# Altium PCB ethernet_ipphone_pcb.PcbDoc
Units mil, origin at the board's own origin, x right, y up, seen from the top; angles counter-clockwise.
Board outline 2451 x 1336 mil, 2 copper layers (Top Layer, Bottom Layer); 41 components, 37 nets, 160 pads, 39 vias.
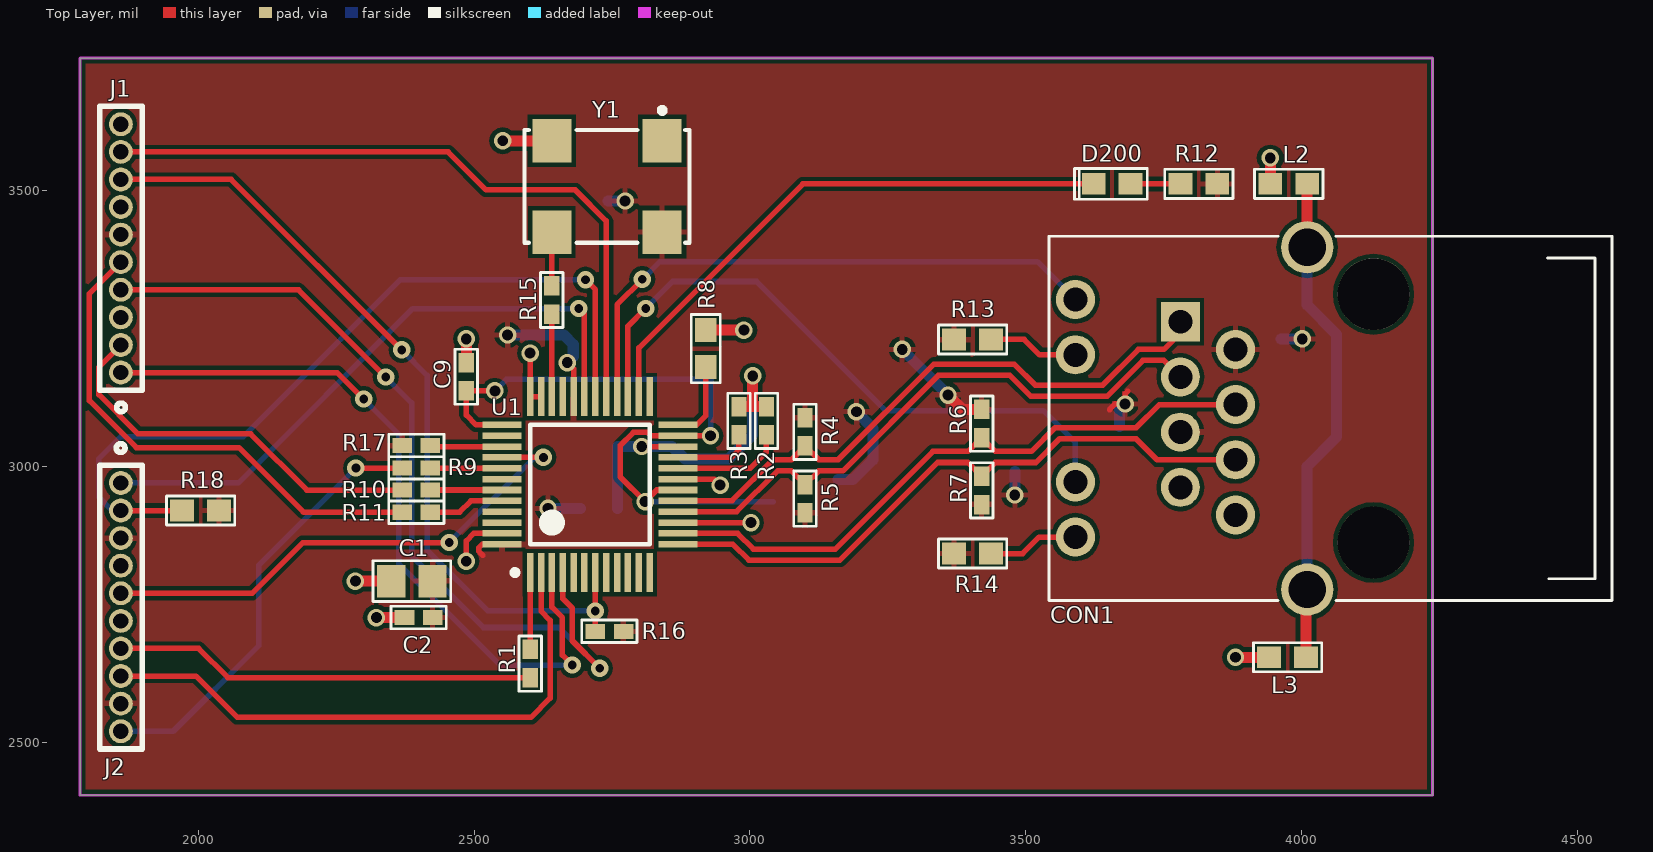
[diagram p0: Top Layer view]
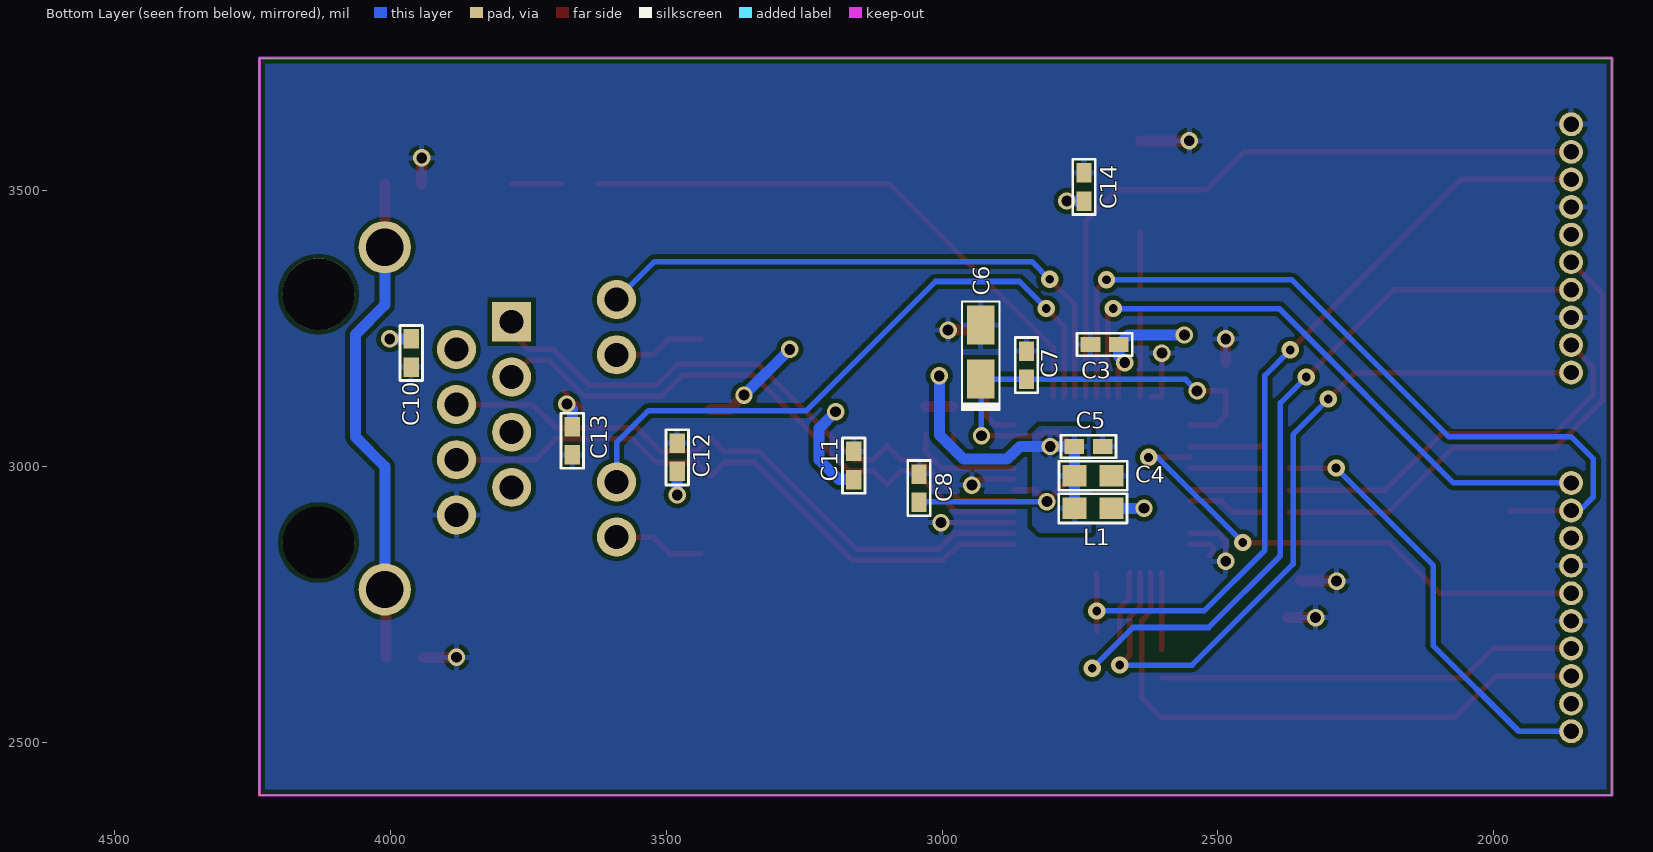
[diagram p1: Bottom Layer view, seen from below]
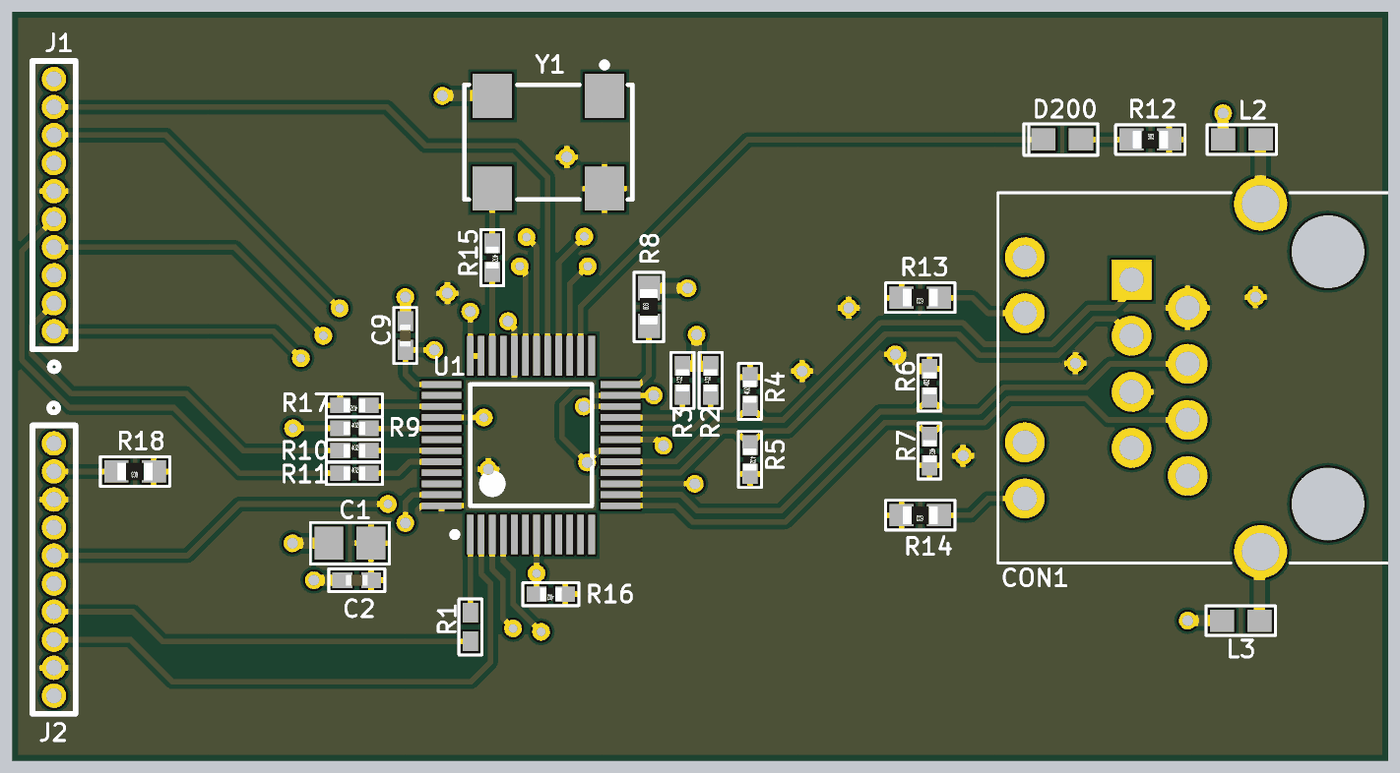
[diagram p2: 3D render of the assembled board from above, using the file's embedded part models]
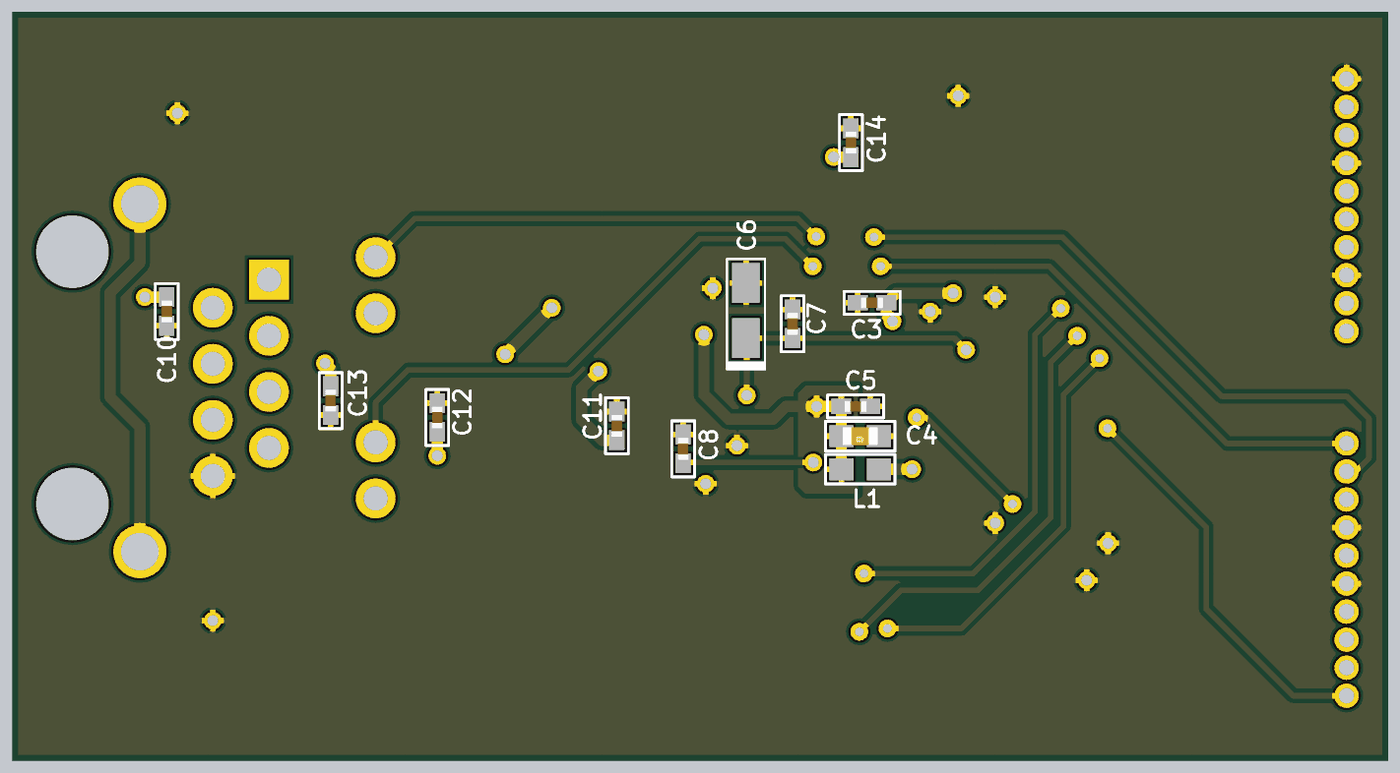
[diagram p3: 3D render of the assembled board from below, using the file's embedded part models]

## Layer stack, top to bottom
Top Layer: signal copper 1.4
Dielectric: dielectric 12.6, FR-4, Dk 4.8
Bottom Layer: signal copper 1.4

## Board outline
1786,2404 1786,3740 4237,3740 4237,2404

## Design rules (kind name [scope] priority, off if disabled: settings)
Clearance [All] p1: gap=5
ComponentClearance [All] p1: gap=0 collisioncheckmode=3 verticalgap=5 showdistances=FALSE
DiffPairsRouting [All] p1: maxlimit=20 minlimit=5 mostfreqgap=10 maxuncoupledlength=500
PolygonConnect [All] p1: connectstyle=Relief reliefconductorwidth=10 reliefentries=4 polygonreliefangle="90 Angle"
RoutingVias [All] p1: holewidth=23.62 width=35.43 viastyle="Through Hole" minholewidth=11.81 minwidth=23.62 maxholewidth=35.43 maxwidth=51.18
SilkscreenOverComponentPads [All] p1: minsilkscreentomaskgap=10
SolderMaskExpansion [All] p1: expansion=4
Width [All] p1: maxlimit=30 minlimit=5 preferedwidth=10 minimp=50.000000 maximp=50.000000 favimp=50.000000
25 further rules are at their usual default settings.

## Classes and differential pairs
differential pair RD: +RD_P -RD_N
differential pair TD: +TD_P -TD_N

## Components (designator, comment, footprint, x,y, rotation, side; value= is the part's Value field where it differs from the comment)
C1 "10uF" CC2012-0805 2350,2792 r0 top
C2 "100nF" CC1005-0402 2374,2726 r0 top
C3 "100nF" CC1005-0402 2731,3221 r180 bottom
C4 "1uF" CC1608-0603 2693,2983 r0 bottom
C5 "100nF" CC1005-0402 2709,3036 r0 bottom
C6 "10uF" C_Case_A 2930,3207.2 r90 bottom
C7 "100nF" CC1005-0402 2847,3209 r270 bottom
C8 "100nF" CC1005-0402 3042,2986 r270 bottom
C9 "100nF" CC1005-0402 2486,3188 r270 top
C10 "100nF" CC1005-0402 3962,3231 r270 bottom
C11 "100nF" CC1005-0402 3160,3027 r270 bottom
C12 "100nF" CC1005-0402 3480,3042 r270 bottom
C13 "100nF" CC1005-0402 3670,3072 r270 bottom
C14 "10nF" CC1005-0402 2743,3532 r270 bottom
CON1 "RJ-45" RJ-45 3780,3262 r90 top
D200 "RED" LED_0603 3690,3512 r180 top
J1 "CONN HEADER" CONECTOR_10_PIN 1860,3170 r90 top
J2 "CONN HEADER" CONECTOR_10_PIN 1860,2970 r270 top
L1 "FBEAD" INDUTOR_0603 2693.07,2924 r0 bottom
L2 "FBEAD" INDUTOR_0603 3943,3512 r0 top
L3 "FBEAD" INDUTOR_0603 3941,2654 r0 top
R1 "49R9" CR1005-0402_NP 2602,2617 r90 top
R2 "2K2" CR1005-0402 3030,3057 r90 top
R3 "2K2" CR1005-0402 2980,3057 r90 top
R4 "49R9" CR1005-0402 3100,3037 r90 top
R5 "49R9" CR1005-0402 3100,2967 r270 top
R6 "49R9" CR1005-0402 3420,3052 r90 top
R7 "49R9" CR1005-0402 3420,2982 r270 top
R8 "4K87" CR1608-0603 2920,3180 r90 top
R9 "49R9" CR1005-0402 2369.82,2997 r0 top
R10 "49R9" CR1005-0402 2369.82,2957 r0 top
R11 "49R9" CR1005-0402 2369.82,2917 r0 top
R12 "100R" CR1608-0603 3780,3512 r0 top
R13 "100R" CR1608-0603 3437,3230 r180 top
R14 "100R" CR1608-0603 3437,2842 r180 top
R15 "33R" CR1005-0402 2641,3327 r270 top
R16 "10K" CR1005-0402 2771,2701 r180 top
R17 "2K2" CR1005-0402 2421,3038 r180 top
R18 "1K5" CR1608-0603 2038,2920 r180 top
U1 "DP83848C" LQFP48 2710,2967 r90 top
Y1 "25MHz" OSC_25MHz_PHY 2841,3590 r0 top

## Footprints (in the part's own frame and the unit in brackets; to place one, negate y for a bottom-side part, rotate by r counter-clockwise, add the part's x,y. Pads: shape width x height; smd on the part's side, far side on the other; paste and mask are expansions set on the pad)
C_Case_A [mm]
  rect 1.8x1.25 smd: 1(-1.25,0) 2(1.25,0)
  silkscreen extent -2.67,-0.9 2.33,0.9
CC1005-0402 [mm] "Chip Capacitor; Body 1.0 x 0.5 mm (LxW typ)"
  rect 0.9x0.7 smd: 1(0,0) 2(1.3,0)
  silkscreen extent -0.62,-0.52 1.92,0.52, body extent 0.15,-0.25 1.15,0.25, height 0.5
CC1608-0603 [mm] "Chip Capacitor; Body 1.6 x 0.8 mm (LxW typ)"
  rect 1.1x1 smd: 1(0,0) 2(1.7,0)
  silkscreen extent -0.72,-0.67 2.42,0.67, body extent 0.05,-0.4 1.65,0.4, height 0.3
CC2012-0805 [mm] "Chip Capacitor; Body 2.0 x 1.2 mm (LxW typ)"
  rect 1.3x1.5 smd: 1(0,0) 2(1.9,0)
  silkscreen extent -0.84,-0.94 2.74,0.94
CONECTOR_10_PIN [mm]
  round 1.1 hole 0.7: 1(0,0) 2(1.27,0) 3(2.54,0) 4(3.81,0) 5(5.08,0) 6(6.35,0) 7(7.62,0) 8(8.89,0) 9(10.16,0) 10(11.43,0)
  silkscreen extent -1.81,-0.98 12.25,0.98
CR1005-0402 [mm] "Chip Resistor; Body 1.1 x 0.5 mm (LxW typ)"
  rect 0.9x0.7 smd: 1(0,0) 2(1.3,0)
  silkscreen extent -0.62,-0.52 1.92,0.52, body extent 0.15,-0.3 1.15,0.3, height 0.2
CR1005-0402_NP [mm] "Chip Resistor; Body 1.1 x 0.5 mm (LxW typ)"
  rect 0.9x0.7 smd: 1(0,0) 2(1.3,0)
  silkscreen extent -0.62,-0.52 1.92,0.52
CR1608-0603 [mm] "Chip Resistor; Body 1.6 x 0.8 mm (LxW typ)"
  rect 1.1x1 smd: 1(0,0) 2(1.7,0)
  silkscreen extent -0.72,-0.67 2.42,0.67, body extent 0.05,-0.4 1.65,0.4, height 0.3
INDUTOR_0603 [mm]
  rect 1.1x1 smd: 1(0,0) 2(1.7,0)
  silkscreen extent -0.72,-0.67 2.42,0.67
LED_0603 [mm] "LED 0603"
  rect 1.1x1 smd: 1(0,0) 2(1.7,0)
  silkscreen extent -0.76,-0.71 2.59,0.71
LQFP48 [mm]
  rect 1.8x0.3 smd: 1(-4.05,2.75) 2(-4.05,2.25) 3(-4.05,1.75) 4(-4.05,1.25) 5(-4.05,0.75) 6(-4.05,0.25) 7(-4.05,-0.25) 8(-4.05,-0.75) 9(-4.05,-1.25) 10(-4.05,-1.75) 11(-4.05,-2.25) 12(-4.05,-2.75) 25(4.05,-2.75) 26(4.05,-2.25) 27(4.05,-1.75) 28(4.05,-1.25) 29(4.05,-0.75) 30(4.05,-0.25) 31(4.05,0.25) 32(4.05,0.75) 33(4.05,1.25) 34(4.05,1.75) 35(4.05,2.25) 36(4.05,2.75)
  rect 0.3x1.8 smd: 13(-2.75,-4.05) 14(-2.25,-4.05) 15(-1.75,-4.05) 16(-1.25,-4.05) 17(-0.75,-4.05) 18(-0.25,-4.05) 19(0.25,-4.05) 20(0.75,-4.05) 21(1.25,-4.05) 22(1.75,-4.05) 23(2.25,-4.05) 24(2.75,-4.05) 37(2.75,4.05) 38(2.25,4.05) 39(1.75,4.05) 40(1.25,4.05) 41(0.75,4.05) 42(0.25,4.05) 43(-0.25,4.05) 44(-0.75,4.05) 45(-1.25,4.05) 46(-1.75,4.05) 47(-2.25,4.05) 48(-2.75,4.05)
  silkscreen extent -4.17,-2.75 2.75,3.57
OSC_25MHz_PHY [mm]
  rect 1.8x2 smd: 1(0,0) 2(-5.08,0) 3(-5.08,-4.2) 4(0,-4.2)
  silkscreen extent -6.34,-4.7 1.26,1.52
RJ-45 [mm]
  rect 1.8x1.8 hole 1.1: 1(0,0)
  round 1.8 hole 1.1: 2(-1.27,-2.54) 3(-2.54,0) 4(-3.81,-2.54) 5(-5.08,0) 6(-6.35,-2.54) 7(-7.62,0) 8(-8.89,-2.54) 9(1.02,4.83) 10(-1.52,4.83) 11(-7.37,4.83) 12(-9.91,4.83)
  round 2.4 hole 1.71: 13(3.43,-5.84) 14(-12.32,-5.84)
  round 3.3 hole 3.3 unplated: ""(-10.16,-8.89) ""(1.27,-8.89)
  silkscreen extent -12.83,-19.87 3.94,6.04

## Part data
C1: library part Capacitor, "Capacitor SMD/SMT 0603 10uF 6.3volts X5R 20%"
C2 C3 C5 C7 C8 C9 C10 C11 C12 C13: library part Capacitor, "MLCC - SMD/SMT 0.1UF 16V 10% 0402"
C4: library part Capacitor, "Capacitor"
C6: library part Capacitor_Tan, "Capacitor Tantalum"
C14: library part Capacitor, "Capacitor SMD/SMT 0402 0.01uF 16volts X7R 10%"
CON1: "Ethernet & Telecom Connectors 1X1 RJ45 JACK"
D200: library part LED, "LED"
J1 J2: library part "Conector 10pin", "CONN HEADER .050\" 10POS PCB GOLD"
L1 L2 L3: library part Inductor, "Inductor"
R1 R4 R5 R6 R7 R9 R10 R11: library part Resistor, "Thick Film Resistors - SMD 1/16watt 49.9ohms 1% 0402"
R2 R3 R17: library part Resistor, "Thick Film Resistors SMD 0402 2K2 5%  1/16 W"
R8: library part Resistor
R12 R13 R14: library part Resistor, "Thick Film Resistors 1/16WATT 100R 0402"
R15: library part Resistor, "Thick Film Resistors SMD 0402 33R 5%  1/16 W"
R16: library part Resistor, "Thick Film Resistors SMD 0402 10K 5%  1/16 W"
R18: library part Resistor, "Thick Film Resistors 1.5KOHM 5% 1/10W"
U1: "IC TXRX ETHERNET PHYTER 48-LQFP"
Y1: library part Oscillator_25MHz_Phy, "Standard Clock Oscillators 3.3V 25MHZ"

## Via types
v1: diameter 31.5, hole 19.68, Top Layer to Bottom Layer, 26 vias
v2: diameter 31.5, hole 15.75, Top Layer to Bottom Layer, 13 vias

## Nets (pads, with @x,y where several pads share a name; then routed paths per layer and width w, separated by ;. In a path a pad name is that pad's centre, name@x,y a point inside that pad or via, vN(x,y) a via of type N, cw(c..) or ccw(c..) an arc to the next point about the centre after c; other vN are vias at no path point)
\R\E\S\E\T\: J1.9 U1.29 | length 1249.8
  Top Layer w10: J1.9 2453,3570 2522,3501 2683.42,3501 2739.53,3444.89 U1.29
AVCC3V3: C4.2 C5.2 L1.2 R2.2 R3.2 U1.22 | length 662.9
  Top Layer w10: v1(2804,3035.9) U1.22
  Top Layer w20: R3.2 3005,3108.18 ; v1(3005,3164) 3005,3108.18 ; R2.2 3005,3108.18
  Bottom Layer w20: L1.2 2760.18,2924.18 C5.2 2803.9,3036 v1(2804,3035.9) 2859.1,3035.9 2882,3013 2961,3013 3005,3057 v1(3005,3164)
CRS_DV: J2.5 U1.40 | length 943
  Top Layer w10: J2.5 2098,2770 2190,2862 v2(2455,2862) ; U1.40 v2(2625.79,3016.21)
  Bottom Layer w10: v2(2455,2862) 2609.21,3016.21 v2(2625.79,3016.21)
EARTH: CON1.13 CON1.14 L2.2 L3.2 | length 902.8
  Top Layer w20: L3.2 4007.93,2774.97 CON1.14 ; CON1.13 L2.2
  Bottom Layer w20: CON1.14 4009.92,2999.92 4063,3053 4063,3239 4009.92,3292.08 CON1.13
GND: C1.1 C2.1 C3.1 C4.1 C5.1 C6.2 C7.1 C8.1 C9.1 C10.2 C11.1 C12.1 C13.2 C14.1 CON1.8 J1.3 J1.7 J1.10 J2.4 J2.6 L2.1 L3.1 R8.2 U1.15 U1.19 U1.35 U1.36 U1.47 Y1.2 | length 844.2
  Top Layer w10: v1(2486,2828) 2486,2865 2499.42,2878.42 U1.47 ; v1(2601.73,3205.27) U1.36 U1.35 ; U1.15 v1(3001.9,2898.1) ; U1.19 2935.16,2976.84 v1(2946,2966)
  Top Layer w20: v1(2285,2792) C1.1 ; v1(2323,2726) C2.1 ; C9.1 v1(2486,3231) ; v1(2552,3590) Y1.2 ; R8.2 v1(2989.07,3246.93) ; v1(3880,2654) L3.1 ; L2.1 v1(3943,3559)
MDC: J2.1 U1.31 | length 1124.6
  Top Layer w10: v2(2690,3286) 2700.16,3275.84 U1.31
  Bottom Layer w10: J2.1 2073,2970 2389,3286 v2(2690,3286)
MDIO: J2.2 R18.2 U1.30 | length 1466.2
  Top Layer w10: J2.2 R18.2 ; v2(2702,3338) 2719.84,3320.16 U1.30
  Bottom Layer w10: J2.2 1844,2920 1820,2944 1820,3014 1860,3054 2082,3054 2366,3338 v2(2702,3338)
NetCON1_9: CON1.9 U1.28 | length 1058.1
  Top Layer w10: U1.28 2759.21,3293.21 v2(2805,3339)
  Bottom Layer w10: v2(2805,3339) 2837,3371 3521,3371 CON1.9
NetCON1_10: CON1.10 R13.1 | length 164.4
  Top Layer w10: R13.1 3497,3230 3524.84,3202.16 CON1.10
NetCON1_11: CON1.11 U1.27 | length 1164.2
  Top Layer w10: U1.27 2778.9,3253.9 v2(2811,3286)
  Bottom Layer w10: v2(2811,3286) 2860,3335 3012,3335 3246,3101 3532,3101 3589.84,3043.16 CON1.11
NetCON1_12: CON1.12 R14.1 | length 165.2
  Top Layer w10: R14.1 3494,2842 3523.84,2871.84 CON1.12
NetD200_1: D200.1 R12.1 | length 90
  Top Layer w10: D200.1 R12.1
NetD200_2: D200.2 U1.26 | length 1035.8
  Top Layer w10: U1.26 2798.58,3214.58 3096,3512 D200.2
NetR1_2: R1.2 U1.1 | length 139.5
  Top Layer w10: U1.1 2601.73,2668.45 R1.2
NetR2_1: R2.1 U1.20 | length 203.8
  Top Layer w10: U1.20 3000.53,2996.53 3030,3026 R2.1
NetR3_1: R3.1 U1.21 | length 143.3
  Top Layer w10: U1.21 2966.21,3016.21 2980,3030 R3.1
NetR8_1: R8.1 U1.24 | length 145.5
  Top Layer w10: U1.24 2903.27,3075.27 2920,3092 R8.1
NetR9_2: R9.2 U1.41 | length 129.7
  Top Layer w10: R9.2 2421.47,2996.53 U1.41
NetR10_2: R10.2 U1.43 | length 129.6
  Top Layer w10: R10.2 2421.16,2957.16 U1.43
NetR11_2: R11.2 U1.44 | length 138
  Top Layer w10: R11.2 2474,2917 2494.47,2937.47 U1.44
NetR15_1: R15.1 Y1.3 | length 97.6
  Top Layer w10: R15.1 Y1.3
NetR15_2: R15.2 U1.34 | length 149.4
  Top Layer w10: R15.2 2641,3126.55 U1.34
NetR17_1: R17.1 U1.39 | length 130.4
  Top Layer w10: R17.1 2423.1,3035.9 U1.39
P\H\Y\_\I\N\T\: J1.8 R16.2 U1.7 | length 1476
  Top Layer w10: J1.8 2060,3520 v2(2369,3211) ; R16.2 v2(2719.84,2738) U1.7
  Bottom Layer w10: v2(2369,3211) 2415,3165 2415,2848 2525,2738 v2(2719.84,2738)
PF: C6.1 C7.2 C8.2 C9.2 U1.18 U1.23 U1.37 | length 1267.7
  Top Layer w10: v1(2537.82,3136.82) C9.2 2486,3093 2503.73,3075.27 U1.37 ; U1.18 2831.16,2957.16 v1(2810,2936) 2765,2981 2765,3038 2788.65,3061.65 2814.67,3061.65 2820.73,3055.58 U1.23 v1(2928.58,3055.58)
  Bottom Layer w10: v1(2537.82,3136.82) 2558.82,3157.82 C7.2 2929.83,3157.82 2928.58,3156.57 v1(2928.58,3055.58) ; v1(2810,2936) C8.2@3042,2936
RD_N: CON1.6 R7.1 U1.13 | length 1150
  Top Layer w10: U1.13 2969.27,2858.73 2998,2830 3163,2830 3340,3007 3395,3007 R7.1 3445,3007 3518.28,3007 3561.28,3050 3700,3050 3738,3012 CON1.6
RD_P: CON1.4 R6.1 U1.14 | length 1151.7
  Top Layer w10: U1.14@2869.45,2878.73 2977.55,2878.73 3006.28,2850 3154.72,2850 3331.72,3027 3395,3027 R6.1 3445,3027 3510,3027 3553,3070 3700,3070 3742,3112 CON1.4
REF_CLK: J2.7 R1.1 | length 764
  Top Layer w10: J2.7 2001,2670 2054,2617 R1.1
RX_ER: J2.10 R9.1 | length 792.9
  Top Layer w10: v2(2286,2997) R9.1
  Bottom Layer w10: J2.10 1955,2520 2110,2675 2110,2821 v2(2286,2997)
RXD0: J1.2 R10.1 | length 728
  Top Layer w10: J1.2 1820,3180 1820,3130 1891,3059 2095,3059 2197,2957 R10.1
RXD1: J1.5 R11.1 | length 925.1
  Top Layer w10: J1.5 1803,3313 1803,3119 1888,3034 2074,3034 2191,2917 R11.1
TD_N: CON1.3 R5.1 U1.16 | length 1088.7
  Top Layer w10: U1.16@2869.45,2918 2976,2918 3050,2992 3075,2992 R5.1 3125,2992 3168.28,2992 3341.28,3165 3471,3165 3509,3127 3647.28,3127 3712.28,3192 3750,3192 CON1.3
TD_P: CON1.1 R4.1 U1.17 | length 1108.7
  Top Layer w10: U1.17@2869.45,2938 2967.72,2938 3041.72,3012 3075,3012 R4.1 3125,3012 3160,3012 3333,3185 3479.28,3185 3517.28,3147 3639,3147 3704,3212 3750,3212 3780,3242 CON1.1
TXD0: J1.1 U1.3 | length 1358
  Top Layer w10: J1.1 2252,3170 v2(2300,3122) ; U1.3 2641.1,2744.9 2660,2726 2660,2658 v2(2678,2640)
  Bottom Layer w10: v2(2300,3122) 2364,3058 2364,2823 2547,2640 v2(2678,2640)
TXD1: J1.4 U1.4 | length 1515.8
  Top Layer w10: J1.4 2182,3320 v2(2340,3162) ; U1.4 2660.79,2760.21 2678,2743 2678,2684 v2(2728,2634)
  Bottom Layer w10: v2(2340,3162) 2387,3115 2387,2838 2517,2708 2654,2708 v2(2728,2634)
TXEN: J2.8 U1.2 | length 1058
  Top Layer w10: J2.8 1996,2620 2071,2545 2603,2545 2638,2580 2638,2721 2621.42,2737.58 U1.2
VCC3V3: C1.2 C2.2 C3.2 C10.1 C11.2 C12.2 C13.1 C14.2 CON1.2 CON1.5 J1.6 J2.3 J2.9 L1.1 R4.2 R5.2 R6.2 R7.2 R12.2 R13.2 R14.2 R16.1 R17.2 R18.1 U1.32 U1.48 Y1.4 | length 932.5
  Top Layer w10: 2516,2838.66 2508.37,2846.29 2508.37,2852.37 2514.73,2858.73 U1.48 ; v1(2669,3188) 2680.47,3176.53 U1.32 ; 3651.65,3103 3661.65,3113 v1(3680,3113) 3680,3131.22 3685,3136.22
  Top Layer w20: v1(3359,3129) 3384.82,3103.18 R6.2
  Bottom Layer w20: v1(2561,3238) 2662.82,3238 C3.2 2679.82,3198.82 v1(2669,3188) ; v1(2634,2924) L1.1 ; C14.2 v1(2773.82,3480.82) ; C11.2 3186.82,2975.82 3223,3012 3223,3069 v1(3193,3099) ; v1(3276,3212) v1(3359,3129) ; v1(3480,2948) C12.2 ; C13.1 3670,3103 v1(3680,3113) ; C10.1 v1(4001,3231)
pads on no net: CON1. CON1.7 U1.5 U1.6 U1.8 U1.9 U1.10 U1.11 U1.12 U1.25 U1.33 U1.38 U1.42 U1.45 U1.46 Y1.1

## Polygon pours and split planes (outlines as drawn)
GND on Bottom Layer "Component Side-No Net" (solid, remove dead copper, pour order 9): 1786,3740 1786,2404 4237,2404 4237,3740 1786,3740
AVCC3V3 on Bottom Layer "Component Side-No Net" (solid, remove dead copper, pour order 2): 2730,2880 2824,2880 2837,2893 2837,3060 2824,3073 2730,3073
VCC3V3 on Top Layer "Component Side-No Net" (solid, remove dead copper, pour order 11): 1786,3740 1786,2404 4237,2404 4237,3740 1786,3740

## Keep-outs
Keep-Out Layer:
  the board outline again, w5